# Altium PCB pcbxiao.PcbDoc (part 2 of 3)
Units mil, origin at the board's own origin, x right, y up, seen from the top; angles counter-clockwise.
Board outline 4666.32 x 1182.42 mil, 4 copper layers (Top Layer, Mid-Layer 1, Mid-Layer 2, Bottom Layer); 288 components, 144 nets, 734 pads, 278 vias.
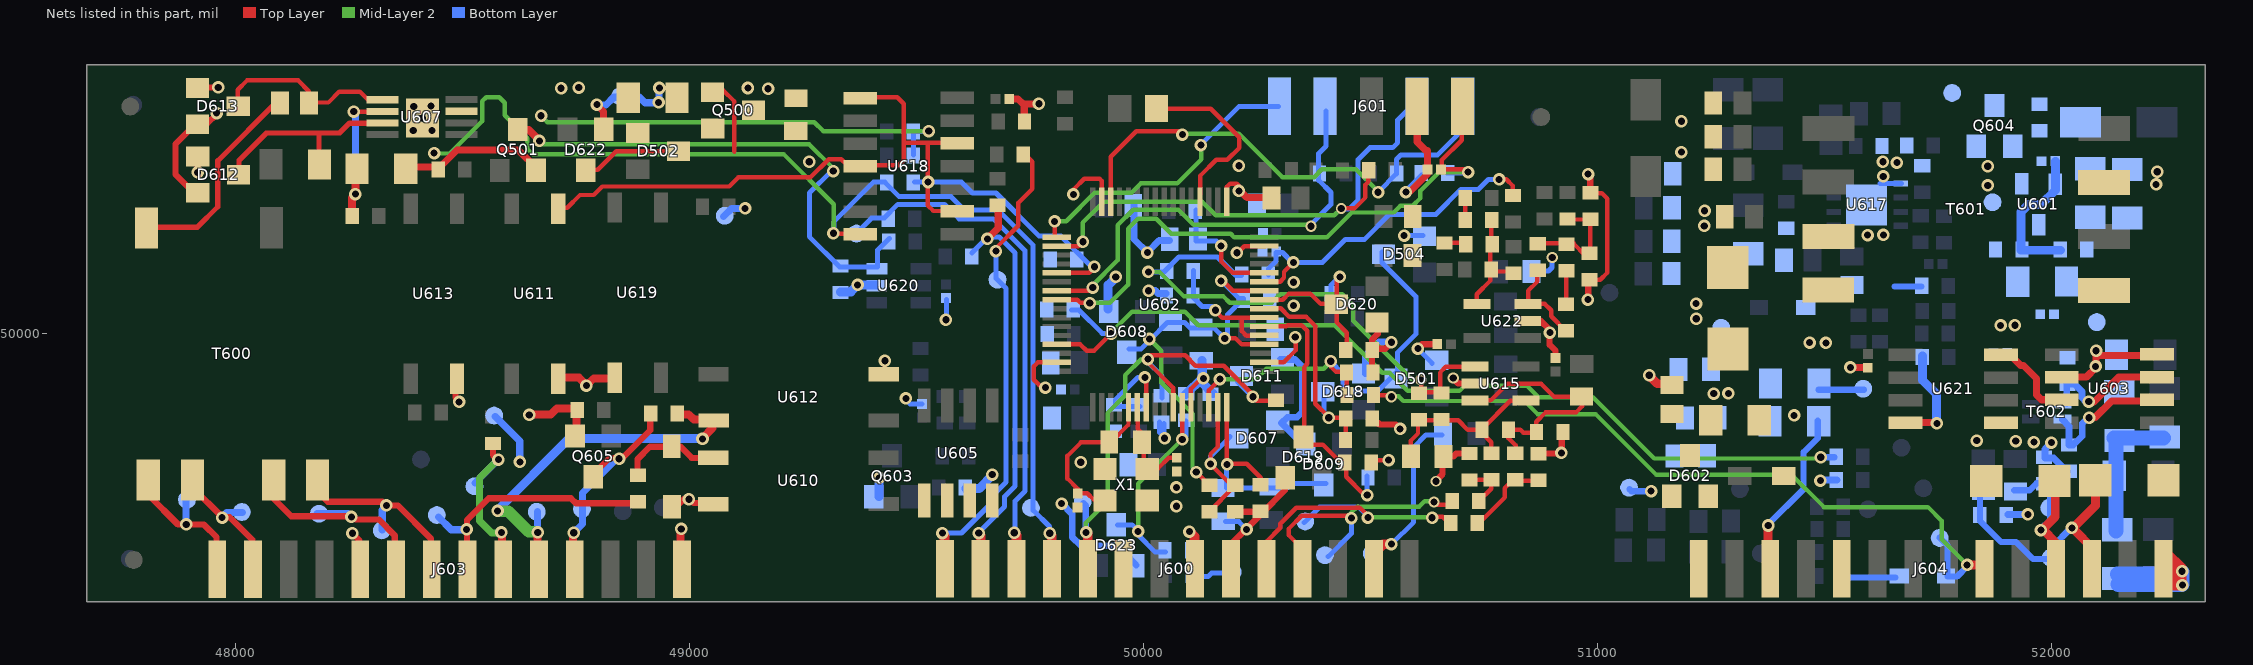
[diagram p3: the nets of this part, all layers, seen from the top]

## Via types
v1: diameter 27.56, hole 15.75, Top Layer to Bottom Layer, 267 vias
v2: diameter 25, hole 15.75, Top Layer to Bottom Layer, 7 vias
v3: diameter 24, hole 15.75, Top Layer to Bottom Layer, 4 vias

## Nets (pads, with @x,y where several pads share a name; then routed paths per layer and width w, separated by ;. In a path a pad name is that pad's centre, name@x,y a point inside that pad or via, vN(x,y) a via of type N, cw(c..) or ccw(c..) an arc to the next point about the centre after c; other vN are vias at no path point)
GND: C500.1 C501.2 C502.2 C503.1 C504.2 C505.2 C506.2 C507.1 C604.1 C605.2 C606.1 C608.1 C609.1 C610.1 C611.1 C613.1 C614.2 C615.2 C616.2 C618.1 C619.1 C620.1 C621.1 C625.1 C630.1 C632.1 C634.1 C635.2 C636.2 C637.1 C644.2 C645.1 C646.1 C647.1 C648.1 C650.2 C653.1 C664.2 C665.1 C666.2 C667.1 C671.2 C672.2 C675.2 C676.2 C681.2 C687.1 C688.1 C689.1 C699.2 C700.2 C816.1 C817.1 C818.1 C820.2 C821.1 C822.2 C823.1 C824.1 C826.1 C827.1 D501.1 D502.1 D504.1 D607.1 D608.1 D609.1 D611.1 D612.1 D613.1 D618.1 D619.1 D620.1 D623.1 J600.2 J600.4 J600.6 J600.9 J601.4 J604.5 Q501.2 Q603.2 R504.2 R600.1 R605.1 R612.1 R630.2 R631.1 R635.1 R645.1 R646.2 R654.1 R669.1 R689.2 R696.2 R706.1 R804.1 R811.1 R821.2 R822.1 R835.1 R837.2 T601.3 T601.5 TP12.1 TP16.1 TP24.1 U602.12 U602.18 U602.31 U602.33 U602.47 U602.63 U605.1 U605.2 U605.3 U605.4 U607.1@48411.23,50474.3 U607.3 U612.2 U615.2 U617.1@51667.92,50330 U617.6 U618.7 U620.2 U621.4 U622.2 X1.2 X1.4 | length 9395.9
  Top Layer w9.84: v1@49316.35,50219.17 U618.7@49388.43,50219.17 ; U612.2@49430.3,49910 v1@49430.3,49939.58 ; v1@49785.62,49881.46 49774.68,49881.46 49769.57,49886.56 49758.32,49897.81 49758.32,49926.88 49767.49,49936.04 U602.63@49809.89,49936.04 ; v1@49846.97,50306.46 49846.97,50317.92 49869.47,50340.42 49903.22,50340.42 49908.01,50335.62 U602.47@49908.01,50307.71 ; U602.12@50104.47,49834.79 50104.47,49877.71 50128.85,49902.08 v1@50133.64,49902.08 ; U602.33@50183.43,50287.71 50183.43,50322.29 50190.72,50329.58 50205.1,50329.58 50209.47,50325.21 v1@50209.47,50310.62 ; v1@50205.1,50174.79 50222.18,50191.88 U602.31@50267.6,50191.88 ; U602.18@50261.55,49936.04 50308.85,49936.04 50334.89,49962.08 v1@50334.89,49992.92 ; C648.1@50499.26,49720.21 v1@50539.26,49720.21 ; R835.1@50981.76,50117.92 51006.14,50117.92 51021.97,50133.75 51021.97,50296.67 51009.68,50308.96 C650.2@50988.01,50308.96
  Top Layer w13.78: D613.1@47905.3,50541.25 v1@47961.14,50541.25 ; v1@47916.55,50355 D612.1@47916.55,50398.75 ; J600.9@50192.39,49478.33 50192.39,49535.21 50225.94,49568.76 50261.05,49603.87 50311.35,49654.17 D619.1@50311.35,49685 ; C503.1@50204.68,49606.88 C645.1@50258.64,49606.88 ; C604.1@50502.18,49965.62 C604.1@50503.43,49965.62 ; C500.1@50503.43,49914.79 C604.1@50503.43,49965.62 ; C647.1@50507.8,49811.04 50519.89,49798.96 50555.72,49798.96 v1@50565.93,49788.75 ; D620.1@50515.72,50026.88 50515.72,49998.54 50503.43,49986.25 C604.1@50503.43,49965.62 ; v1@50546.55,49979.58 50532.6,49965.62 C604.1@50503.43,49965.62 ; v1@50603.43,49966.25 50613.22,49976.04 C620.1@50645.93,49976.04 ; v3@50644.05,49675.21 50658.64,49689.79 50658.64,49729.17 50683.01,49729.17 50689.05,49735.21 C672.2@50716.97,49735.21 ; v2@50681.76,49900.83 50693.22,49889.38 U615.2@50732.6,49889.38 ; U622.2@50841.14,50027.5 50874.47,50027.5 50894.47,50007.5 50894.47,49974.79 50907.8,49961.46 C818.1@50907.8,49945 ; C671.2@50868.43,49735.21 50921.14,49735.21 R654.1@50921.14,49777.08 ; v1@50978.85,50350.62 50984.26,50345.21 C650.2@50984.26,50311.88 ; v1@50979.47,50075.42 R835.1@50979.47,50116.67
  Top Layer w15.75: C667.1@48395.3,50366.46 48450.1,50366.46 48487.6,50403.96 48622.8,50403.96 48664.87,50361.9 Q501.2@48666.97,50359.79 ; v1@49655.93,50207.71 49680.1,50231.88 R821.2@49680.1,50279.79 ; C621.1@49705.1,50516.25 49723.85,50516.25 49735.3,50504.79 v1@49768.64,50504.79 ; R822.1@49737.18,50462.29 49737.18,50503.54 ; v1@50213.64,50313.12 50227.6,50299.17 C507.1@50278.01,50299.17 ; v1@50580.51,50312.29 v1@50583.43,50312.29 ; v1@50587.07,50312.29 50625.4,50350.62 50625.4,50402.29 ; J601.4@50603.01,50502.92 50603.01,50421.04 50621.76,50402.29 ; v1@51557.8,49924.38 C615.2@51596.14,49924.38 ; U621.4@51676.14,49803.12 v1@51746.35,49803.12
  Top Layer w19.68: v1@51114.05,49906.88 51132.18,49888.75 C504.2@51168.01,49888.75
  Top Layer w21.65: v1@49636.55,49558.96 49641.35,49554.17 J600.2@49641.35,49492.92 ; v1@49794.68,49558.33 49797.8,49555.21 J600.4@49797.8,49493.96
  Mid-Layer 2 w9.84: v1@48439.4,50396 48471.83,50396 48542.92,50467.08 48542.92,50511.04 48551.88,50520 48581.04,50520 48592.92,50508.12 48592.92,50480 48642.92,50430 48642.92,50406.04 48655,50393.96 49207.92,50393.96 49317.92,50283.96 v1@49317.92,50220.83 ; v1@48672.92,50478.96 48686.88,50465 49275,50465 49295,50445 v1@49526.9,50445
  Bottom Layer w11.02: v1@49317.92,50220 49317.92,50245.83 49405,50332.92 49430,50332.92 49461.88,50301.04 49575.83,50301.04 49604.79,50272.08 49679.17,50272.08 49757.08,50194.17 49757.08,49610 49792.92,49574.17 v1@49792.92,49556.04 ; v1@49477.92,49857.92 49477.92,49852.08 49486.04,49843.96 C613.1@49512.08,49843.96 ; R600.1@49492.92,50392.92 49492.92,50445 v1@49527.08,50445 ; v1@49566.04,50026 C636.2@49566.04,50073.92 ; R635.1@49622.08,50177.08 49657.08,50212.08 49682.08,50212.08 49717.08,50177.08 49717.08,49663.12 49693.96,49640 49693.96,49617.92 49636.41,49560.37 v1@49636.04,49560 ; C616.2@50035,49805 50035,49781.88 v1@50045,49771.88 ; v1@50045,49767.92 v1@50045,49771.88 ; C616.2@50045,49801.04 v1@50045,49771.88 ; v1@50047.92,49768.96 v1@50045,49771.88 ; R811.1@50181.04,49585 50210,49585 v1@50227.92,49567.08 ; v1@50572.92,50215 D504.1@50616.04,50215 ; v1@50603.96,49966.04 D501.1@50636.04,49933.96 ; R689.2@50862.92,50137.08 50892.08,50137.08 50900,50145 v2@50900,50167.08 ; 51622.08,50330 U617.1@51667.92,50330 U617.1@51670,50330
  Bottom Layer w13.78: 51655,50102.92 R605.1@51713.96,50102.92
  Bottom Layer w14.96: v1@49820,49625 49842.92,49602.08 49842.92,49551.04 49861.88,49532.08 49941.04,49532.08 D623.1@49983.96,49489.17 ; C666.2@49979.17,50282.92 49979.17,50207.08 50008.33,50177.92 50008.39,50177.98 50010.42,50180 50034.58,50204.17 C689.1@50057.08,50204.17 ; v1@50010,50093.96 50026.04,50093.96 50032.08,50087.92 C644.2@50050,50087.92 ; D611.1@50301.04,49942.08 50333.96,49942.08 50347.08,49928.96 50350,49926.04 50350,49827.08 50337.92,49815 50316.88,49815 50303.96,49802.08 D609.1@50350,49756.04 ; D618.1@50488.96,49911.04 50488.96,49951.04 50518.96,49981.04 v1@50547.08,49981.04 ; v1@50577.08,50311.04 50577.66,50311.62 R696.2@50612.92,50346.88 ; v1@51490.83,49677.08 C606.1@51527.92,49677.08
  Bottom Layer w15.75: TP12.1@49075,50257.08 49092.92,50275 v1@49122.08,50275
  Bottom Layer w19.68: C502.2@49332.92,50091.04 49355.21,50091.04 v1@49372.08,50107.92 ; v1@49372.08,50105.92 U620.2@49412.08,50105.92 ; Q603.2@49417.08,49640 v1@49417.08,49682.92 ; R669.1@49608.96,49657.92 49637.92,49657.92 v1@49667.92,49687.92 ; D608.1@49922.08,50052.92 49922.08,50106.04 49939.54,50123.5 v1@49940,50123.96 ; C823.1@50092.92,49865 50094.49,49866.57 50128.96,49901.04 R706.1@50128.96,49940 ; R706.1@50130,49931.04 50130,49890 C821.1@50152.92,49867.08 ; R804.1@51715.83,49950 51715.83,49897.08 51747.08,49865.83 v1@51747.08,49802.08
  other v1: 49793.56,49559.47 49636.9,49559.89 50226.9,49567.8 50072.39,49618.96 49819.4,49624.89 50072.31,49660.3 51491.06,49675.3 49417.73,49681.55 49666.9,49688.64 49861.9,49715.72 50539.81,49720.72 50920.53,49736.55 50046.48,49768.64 50565.23,49789.47 51747.73,49801.55 51433.15,49819.05 49476.48,49856.55 49783.98,49880.3 50131.9,49900.72 51113.98,49907.39 51557.31,49924.89 49430.23,49939.47 50604.28,49966.14 50546.06,49980.3 50334.4,49991.76 50895.12,50001.55 49564.81,50029.89 51217.73,50031.97 50330.65,50060.93 51217.31,50065.3 50978.87,50074.05 50011.06,50093.64 49370.23,50106.55 50330.65,50112.39 49938.98,50124.05 50205.65,50177.39 50008.56,50177.8 49656.06,50207.8 50573.98,50215.3 51595.23,50216.14 51629.81,50216.55 49316.9,50220.3 49122.27,50274.89 49845.65,50305.72 50578.15,50311.14 50210.23,50313.64 51629.4,50345.72 50979.28,50350.72 47916.44,50354.47 50210.23,50369.05 51659.81,50376.14 49263.52,50377.8 51628.98,50377.8 48437.27,50396.97 51184.81,50399.05 49526.9,50445.3 48391.23,50446.39 48432.27,50446.39 51184.81,50466.97 48411.23,50474.3 48673.11,50479.05 48392.27,50499.72 48430.19,50500.35 49769.4,50505.72 48716.86,50539.89 48756.02,50541.14 47961.86,50541.76
  other v2: 50682.2,49901.55 50900.53,50166.97
  other v3: 50644.28,49674.05
GND1: D615.2 J603.5 J603.14 Q605.2 R813.1 TP0.1 U610.2 U611.2 U613.2 U619.3 | length 690.7
  Top Layer w13.78: v1@48258.18,49558.33 48272.76,49543.75 J603.5@48272.76,49507.5 ; U613.2@48484.43,49895.42 48484.43,49858.54 v1@48493.6,49849.38 ; D615.2@48961.51,49608.75 48986.93,49634.17 49001.51,49634.17 49009.43,49626.25 U610.2@49054.01,49626.25
  Top Layer w17.72: v1@48647.56,49820.83 48694.22,49820.83 48707.56,49834.17 R813.1@48748.81,49834.17 ; U611.2@48706.93,49902.08 48756.1,49902.08 48773.18,49885 48789.01,49900.83 U619.3@48829.43,49900.83 ; Q605.2@48750.68,49773.33 R813.1@48750.68,49830.42 ; J603.14@48980.26,49514.17 v1@48980.26,49568.75
  Bottom Layer w15.75: TP0.1@48572.08,49816.67 48625.83,49762.92 v1@48625.83,49715.83
  other v1: 48257.27,49559.47 48981.86,49569.05 48998.52,49634.47 48626.44,49716.55 48646.86,49820.3 48492.27,49848.64 48772.69,49884.89
GND2: C631.2 C656.2 C657.1 C673.1 C674.1 C694.2 C695.2 C802.1 C803.2 C819.1 D605.1 D621.2 R675.1 R806.2 T601.7 TP35.1 U601.3 U603.2 U603.8 U621.5 | length 379.3
  Top Layer w15.75: U603.2@52025.93,49903.33 52076.76,49903.33 52098.01,49924.58 v1@52098.01,49960.21 ; v1@52102.39,49951.25 U603.8@52221.14,49951.25
  Bottom Layer w14.96: C694.2@51903.96,49601.04 v1@51947.92,49601.04 ; v1@51999.17,49757.92 51985.83,49744.58 51985.83,49725 52005,49725 C657.1@52035,49695
  other v1: 51948.22,49600.83 51999.81,49759.05 51961.48,49760.3 51921.48,49762.39 51835.65,49763.64 52097.31,49926.97 52098.56,49961.55 52230.65,50327.8 52233.15,50355.72
NetC500_2: C500.2 D501.3 D504.3 R500.2 U602.14 | length 962.8
  Top Layer w9.84: U602.14@50144.05,49834.17 50144.05,49874.17 v1@50168.22,49898.33 ; v1@50413.22,49938.33 50413.22,49925.62 50424.05,49914.79 50448.22,49914.79 R500.2@50448.22,49857.71
  Mid-Layer 2 w9.84: v1@50167.92,49899.17 50247.92,49899.17 50270.83,49922.08 50397.08,49922.08 v1@50412.08,49937.08
  Bottom Layer w11.02: v1@50411.04,49938.96 50440,49910 50440,49883.96 50451.04,49872.92 50516.04,49872.92 50560,49916.88 50560,49958.02 50600,49998.02 50600,50081.04 50525,50156.04 D504.3@50525,50178.96
  other v1: 50168.15,49899.05 50412.6,49938.33
NetC501_1: C501.1 C667.2 D612.2 D613.2 D622.1 Q500.2 R836.2 TP32.1 U607.6 | length 857
  Top Layer w9.84: v1@48261.35,50488.33 U607.6@48324.47,50488.33
  Top Layer w13.78: D612.2@47915.3,50302.08 47912.3,50305.08 47867.39,50350 47867.39,50416.67 47911.97,50461.25 47936.55,50461.25 v1@47958.22,50482.92
  Top Layer w15.75: v1@48796.14,50502.92 48810.72,50488.33 D622.1@48810.72,50447.71
  Top Layer w17.72: R836.2@48256.55,50256.67 48256.55,50298.54 48263.85,50305.83 C667.2@48263.85,50367.5
  Bottom Layer w15.75: v1@48260,50488.12 48264.17,50483.96 v1@48264.17,50305.83 ; v1@48796.04,50502.92 48816.04,50502.92 48833.12,50520 48890,50520 48902.08,50507.92 48932.92,50507.92 v1@48932.92,50541.04
  other v1: 48263.94,50306.55 47958.11,50484.89 48260.19,50488.22 48796.02,50503.64 48931.86,50508.43 48933.52,50540.3
NetC502_1: C502.1 Q501.3 R505.2 U620.3 | length 1157.8
  Top Layer w15.75: Q501.3@48621.55,50448.33 48645.93,50448.33 48669.99,50424.27 v1@48670.72,50423.54
  Mid-Layer 2 w9.84: v1@48668.96,50423.12 48676.04,50416.04 49263.96,50416.04 49317.08,50362.92 v1@49317.08,50357.08
  Bottom Layer w11.02: v1@49316.04,50357.08 49312.08,50357.08 49263.96,50308.96 49263.96,50212.92 49330.83,50146.04 49413.96,50146.04 49413.96,50182.92 49436,50204.96 R505.2@49440,50208.96
  other v1: 49316.48,50357.39 48669.36,50423.64
NetC503_2: C503.2 D607.3 R506.1 U602.15 | length 357.2
  Top Layer w9.84: R506.1@50145.72,49608.12 50198.43,49660.83 50198.22,49661.04 50147.6,49711.67 50147.6,49733.96 50164.05,49750.42 U602.15@50164.05,49837.71
  Bottom Layer w11.02: v1@50147.92,49712.08 50147.92,49728.96 D607.3@50191.04,49772.08
  other v1: 50147.73,49712.39
NetC504_1: C504.1 C619.2 C826.2 C827.2 D602.3 LB600.1 R659.2
  other v1: 51256.06,49866.97 51288.56,49867.39 51235.23,50236.55 51236.06,50269.89
NetC603_1: C603.1 C670.1 R644.1 R701.1 U622.4 | length 246.6
  Top Layer w9.84: U622.4@50733.85,50066.25 50733.85,50085.83 50764.26,50116.25 R701.1@50764.26,50197.29 ; C603.1@50764.89,50136.04 R644.1@50814.47,50136.04 ; R701.1@50765.93,50198.54 C670.1@50765.93,50251.88
NetC604_2: C604.2 D620.3 R695.2 U602.25 | length 413.1
  Top Layer w9.84: U602.25@50258.01,50074.17 50306.97,50074.17 50320.3,50087.5 50367.6,50087.5 50390.51,50064.58 D620.3@50425.3,50064.58 ; v1@50431.97,50125.83 50431.46,50125.32 50425.3,50119.17 D620.3@50425.3,50064.58 ; D620.3@50433.85,50064.58 D620.3@50425.3,50064.58 ; C604.2@50447.8,49959.58 50447.8,50001.46 50425.3,50023.96 D620.3@50425.3,50064.58
  Bottom Layer w11.02: R695.2@50413.12,50088.96 50413.12,50106.04 v1@50432.08,50125
  other v1: 50432.73,50124.05
NetC605_1: C605.1 R682.1 U602.61 | length 2015.8
  Top Layer w9.84: U602.61@49806.76,49975.42 49860.82,49975.42 49874.78,49961.46 49891.14,49961.46 v1@49930.51,50000.83
  Mid-Layer 2 w9.84: v1@49927.08,50000 49975,50047.92 50090.83,50047.92 50120.83,50017.92 50420.83,50017.92 50526.04,49912.71 50542.08,49912.71 50581.88,49872.92 50696.04,49872.92 50707.08,49883.96 50845,49883.96 50870,49858.96 50990,49858.96 51124.79,49724.17 51487.92,49724.17 v1@51492.08,49728.33
  Bottom Layer w11.02: C605.1@49841.04,50051.04 49857.92,50051.04 49908.96,50000 v1@49928.96,50000
  Bottom Layer w13.78: v1@51491.04,49727.08 R682.1@51522.08,49727.08
  other v1: 51491.9,49726.97 49928.56,49999.05
NetC608_2: C608.2 R603.2 U602.5 X1.1 | length 378.1
  Top Layer w9.84: X1.1@49913.64,49632.92 49891.14,49632.92 49876.14,49647.92 49855.3,49647.92 49855.3,49657.08 49832.39,49680 49832.39,49729.79 49862.18,49759.58 R603.2@49927.6,49759.58 ; R603.2@49924.47,49756.46 R603.2@49927.6,49759.58 ; R603.2@49932.39,49759.58 R603.2@49927.6,49759.58 ; U602.5@49966.97,49848.75 49966.97,49798.96 R603.2@49927.6,49759.58
NetC609_2: C609.2 C630.2 D600.2 D604.2 J604.3 Q500.3 R501.2 TP22.1 | length 434.3
  Top Layer w19.68: J604.3@51376.14,49516.25 v1@51376.14,49575.83
  Bottom Layer w13.78: v1@51375,49577.92 51453.96,49656.88 51453.96,49737.92 51485,49768.96 C630.2@51485,49807.08 ; C609.2@51487.08,49875.83 TP22.1@51587.08,49875.83
  other v1: 51376.06,49576.55 51467.31,49979.47 51503.15,49978.64 49173.11,50538.64 49128.52,50540.3
NetC612_1: C612.1 C684.2 R612.2 R655.1 R679.2 U615.4 | length 419.7
  Top Layer w9.84: R612.2@50589.05,49721.46 50589.05,49763.75 50604.68,49779.38 50604.68,49808.12 50693.22,49808.12 50713.85,49787.5 50738.64,49787.5 50742.17,49783.97 50765.93,49760.21 R679.2@50765.93,49734.17 ; C684.2@50747.8,49791.04 50807.8,49851.04 U615.4@50842.39,49851.04
NetC612_2: C612.2 R655.2 R677.2 R705.2 U615.1 | length 1159.9
  Top Layer w9.84: v2@50611.35,49897.71 50611.35,49870 50653.22,49870 50653.22,49913.54 50665.93,49926.25 U615.1@50724.26,49926.25
  Mid-Layer 2 w9.84: v1@50010,50135 50035.21,50135 50089.17,50081.04 50176.04,50081.04 50190,50067.08 50282.08,50067.08 50301.04,50086.04 50438.12,50086.04 50439.17,50085 50462.08,50062.08 50462.08,50027.92 50592.08,49897.92 v2@50610,49897.92
  Bottom Layer w11.02: v1@50010,50135 50045,50135 50077.92,50167.92 50162.92,50167.92 50203.75,50127.08 R677.2@50216.04,50127.08
  other v1: 50010.65,50135.3
  other v2: 50610.95,49897.39
NetC614_1: C614.1 J601.5 R696.1 U602.56 | length 1404.9
  Top Layer w9.84: U602.56@49805.72,50074.17 49854.05,50074.17 49861.35,50066.88 v1@49881.35,50066.88 ; C614.1@50656.97,50359.79 50656.97,50381.67 50700.72,50425.42 J601.5@50700.72,50495.42 ; C614.1@50659.26,50361.04 50708.43,50361.04 v1@50714.47,50355
  Mid-Layer 2 w9.84: v1@49881.04,50067.08 49926.04,50067.08 49966.04,50107.08 49966.04,50230.21 49987.92,50252.08 50027.92,50252.08 50061.04,50218.96 50192.08,50218.96 50200,50211.04 50403.96,50211.04 50458.96,50266.04 50551.04,50266.04 50566.04,50281.04 50593.12,50281.04 50610,50297.92 50610,50313.96 50651.04,50355 v1@50715,50355
  Bottom Layer w14.96: R696.1@50668.96,50355 v1@50715,50355
  other v1: 49881.48,50066.55 50715.12,50354.89
NetC616_1: C616.1 D611.3 J600.5 R703.2 TP15.1 U602.10 | length 1195.4
  Top Layer w9.84: U602.10@50065.72,49832.92 50065.72,49879.58 50009.89,49935.42 50009.89,49951.25 50091.76,49951.25 50114.26,49928.75 50176.76,49928.75 50240.93,49864.58 50240.93,49858.33 50248.22,49851.04 R703.2@50286.97,49851.04
  Top Layer w21.65: v1@49874.05,49560.62 49877.18,49557.5 J600.5@49877.18,49491.67
  Mid-Layer 2 w9.84: v1@49872.92,49560.83 49872.92,49582.08 49920.83,49630 49920.83,49824.17 49960,49863.33 49960,49907.92 49995,49942.92 v1@50012.08,49942.92
  Bottom Layer w11.02: v1@50008.96,49943.96 50008.96,49937.08 50041.04,49905 ; C616.1@50041.04,49857 50041.04,49904.92 ; D611.3@50207.08,49893.75 v1@50240,49860.83
  Bottom Layer w14.96: TP15.1@49867.92,49625 49872.92,49620 v1@49872.92,49562.08
  other v1: 49873.56,49561.14 50241.06,49860.3 50009.81,49943.22
NetC618_2: C618.2 R677.1 R711.2 U602.27 | length 785.7
  Top Layer w9.84: U602.27@50260.93,50113.65 50301.03,50113.65 50309.47,50122.08 50309.47,50135.52 v1@50330.62,50156.67 ; v1@50783.64,50339.17 50799.26,50339.17 50813.85,50324.58 R711.2@50813.85,50303.33
  Bottom Layer w11.02: R677.1@50275,50127.92 50275,50142.08 50292.08,50159.17 50292.08,50177.92 50306.04,50177.92 50327.92,50156.04 50393.96,50156.04 50445,50207.08 50487.08,50207.08 50542.08,50262.08 50644.17,50262.08 50699.17,50317.08 50737.92,50317.08 50760,50339.17 v1@50782.92,50339.17
  other v1: 50330.23,50156.14 50783.45,50339.05
NetC624_1: C624.1 D613.3 U607.5 | length 418.8
  Top Layer w9.84: D613.3@48004.47,50497.92 48004.47,50536.25 48025.1,50556.88 48137.8,50556.88 48161.35,50533.33 48161.35,50508.33 48204.47,50508.33 48228.64,50532.5 48273.43,50532.5 48292.18,50513.75 U607.5@48323.85,50513.75
NetC624_2: C624.2 T600.2 | length 466.1
  Top Layer w11.81: T600.2@47801.97,50233.75 47915.72,50233.75 47960.72,50278.75 47960.72,50379.79 C624.2@48093.43,50512.5
NetC626_1: C626.1 R805.2 R806.1 U601.2 | length 330.1
  Bottom Layer w19.68: C626.1@52008.96,50377.92 52008.96,50315 51977.92,50283.96 51949.79,50283.96 51932.92,50267.08 51932.92,50182.92 R806.1@52020,50182.92
NetC626_2: C626.2 Q604.1 R803.1 U601.1
NetC628_1: C628.1 R713.1 U622.3 | length 203.9
  Top Layer w9.84: R713.1@50867.8,50146.46 50867.8,50114.17 50847.8,50094.17 50847.8,50065.21 50883.43,50065.21 50898.01,50050.62 50898.01,50037.29 C628.1@50929.68,50005.62
NetC628_2: C628.2 R712.1 | length 85.6
  Top Layer w9.84: C628.2@50931.55,50054.17 R712.1@50931.55,50139.79
NetC631_1: C631.1 C802.2 C819.2 Q604.2 R805.1 TP34.1 U603.3 U621.8 | length 179.5
  Top Layer w15.75: U621.8@51908.95,49952.29 51932.49,49928.75 51938.64,49928.75 51967.18,49900.21 51967.18,49864.38 51978.01,49853.54 U603.3@52026.55,49853.54
  other v1: 51888.15,50017.39 51919.61,50017.8 51859.81,50325.72 51859.81,50367.8
NetC635_1: C635.1 R630.1 U602.53 U611.3 U618.1 U618.4 U618.9 U618.12 | length 1952.5
  Top Layer w9.84: U611.3@48709.47,50276.67 48730.72,50276.67 48758.64,50304.58 48788.85,50304.58 48807.6,50323.33 49087.18,50323.33 49107.18,50343.33 49266.14,50343.33 49306.35,50383.54 49334.47,50383.54 49347.39,50370.62 49460.72,50370.62 49471.55,50381.46 49471.55,50419.79 ; U618.1@49363.01,50519.79 49457.6,50519.79 49471.55,50505.83 49471.55,50419.79 ; 49524.89,50419.17 49524.89,50281.67 49537.18,50269.38 U618.9@49584.26,50269.38 ; U618.12@49595.93,50419.79 49471.55,50419.79 ; U602.53@49805.1,50133.12 49880.3,50133.12 v1@49895.3,50148.12
  Bottom Layer w11.02: C635.1@49495,50332.92 49598.96,50332.92 49622.92,50308.96 49675,50308.96 49770,50213.96 49817.92,50213.96 49884.79,50147.08 v1@49892.92,50147.08
  other v1: 49891.9,50146.55 49525.65,50333.22
NetC644_1: C644.1 R705.1 U602.21 U602.23 | length 315.7
  Top Layer w9.84: v1@50157.39,50049.79 50173.01,50034.17 U602.23@50266.35,50034.17 ; 50216.76,50033.54 50216.76,50004.38 50226.35,49994.79 U602.21@50265.72,49994.79
  Bottom Layer w11.02: R705.1@50110,50137.92 50110,50077.92 50128.96,50058.96 50152.08,50058.96 v1@50157.92,50053.12
  other v1: 50158.56,50050.72
NetC645_2: C645.2 D609.3 R621.2 R811.2 U602.16 | length 504.9
  Top Layer w9.84: v1@50183.43,49712.92 U602.16@50183.43,49837.71 ; v1@50185.1,49712.29 50227.6,49712.29 50258.01,49681.88 C645.2@50258.01,49663.75
  Bottom Layer w11.02: v1@50182.92,49712.08 50182.92,49658.96 50316.04,49658.96 50326.04,49668.96 D609.3@50402.08,49668.96
  other v1: 50183.98,49711.14
NetC646_2: C646.2 D608.3 R506.2 R610.2 R706.2 U602.20 U602.26 | length 993.9
  Top Layer w9.84: v1@50116.76,49693.54 50145.43,49664.88 R506.2@50146.35,49663.96 ; v1@50170.1,50114.79 50175.51,50114.79 50196.76,50093.54 U602.26@50266.35,50093.54 ; v1@50178.43,49989.38 50202.18,49989.38 50216.14,49975.42 U602.20@50266.35,49975.42
  Mid-Layer 2 w9.84: v1@50012.92,49987.92 50039.17,49961.67 50039.17,49892.08 50107.92,49823.33 50107.92,49704.17 50117.05,49695.04 v1@50117.08,49695
  Bottom Layer w11.02: D608.3@49967.92,49965 49993.96,49965 50014.75,49985.79 50052.92,50023.96 50090.21,50023.96 50102.08,50012.08 50155,50012.08 50175,49992.08 50185,49992.08 50185,50041.04 50220,50076.04 50211.04,50076.04 v1@50172.08,50115
  other v1: 50116.06,49694.05 50013.15,49987.39 50178.98,49988.64 50171.06,50115.3
NetC647_2: C647.2 D618.3 R691.2 U602.24 | length 506.7
  Top Layer w9.84: U602.24@50260.93,50054.79 50302.18,50054.79 50320.93,50036.04 50358.64,50036.04 50378.64,50016.04 50378.64,49845 50410.1,49813.54 50445.3,49813.54 R691.2@50445.3,49761.25
  Bottom Layer w11.02: D618.3@50397.08,49878.96 50397.08,49825.83 v1@50408.96,49813.96
  other v1: 50408.15,49814.05
NetC648_2: C648.2 D619.3 R690.2 U602.22 | length 594.6
  Top Layer w9.84: U602.22@50263.43,50015.42 50314.89,50015.42 50317.39,50017.92 50348.64,50017.92 50360.93,50005.62 50360.93,49932.92 50353.64,49925.62 D619.3@50353.64,49764.58 ; D619.3@50350.1,49754.79 50394.89,49754.79 50430.72,49718.96 C648.2@50445.93,49718.96 ; C648.2@50446.55,49713.54 50446.55,49683.75 50484.68,49645.62 v1@50496.14,49645.62
  Bottom Layer w11.02: v1@50492.08,49645 R690.2@50492.08,49686.04
  other v1: 50492.73,49643.64
NetC650_1: C650.1 R634.1 R712.2 R713.2 R835.2 | length 233.9
  Top Layer w9.84: R713.2@50864.89,50197.92 50947.39,50197.92 R835.2@50973.43,50171.88 ; R634.1@50941.76,50250.62 50983.64,50250.62 R835.2@50983.64,50177.92
NetC653_2: C653.2 R603.1 U602.6 X1.3 | length 215.2
  Top Layer w9.84: U602.6@49986.97,49837.71 49986.97,49789.79 R603.1@50005.72,49771.04 ; R603.1@50000.93,49763.75 50000.93,49703.12 50033.01,49703.12 50055.51,49725.62 C653.2@50071.76,49725.62
NetC656_1: C656.1 T602.1 U603.7 | length 293.2
  Top Layer w15.75: v1@52080.51,49848.75 52093.85,49848.75 52148.43,49903.33 U603.7@52236.35,49903.33
  Bottom Layer w14.96: T602.1@52033.96,49846.04 52033.96,49887.92 52051.04,49887.92 52067.08,49871.88 52067.08,49857.92 52075,49850 v1@52082.92,49850
  other v1: 52082.31,49849.47
NetC657_2: C657.2 T602.4 U603.6 | length 312.1
  Top Layer w15.75: v1@52079.26,49814.79 52096.76,49814.79 52132.39,49850.42 U603.6@52230.3,49850.42
  Bottom Layer w14.96: T602.4@52023.96,49810 52038.96,49795 C657.2@52038.96,49753.96 52047.92,49753.96 52067.92,49773.96 52067.92,49801.04 v1@52081.88,49815
  other v1: 52083.15,49813.85
NetC660_1: C660.1 R701.2 | length 54
  Top Layer w9.84: C660.1@50663.01,50199.17 R701.2@50716.97,50199.17
NetC670_2: C670.2 R601.2 | length 51.5
  Top Layer w9.84: C670.2@50709.05,50248.33 R601.2@50709.05,50299.79
NetC671_1: C671.1 R619.1 R678.1 | length 174.1
  Top Layer w9.84: R619.1@50741.76,49584.38 50795.72,49638.33 50795.72,49658.96 50811.97,49675.21 C671.1@50866.14,49675.21
NetC672_1: C672.1 R620.1 R679.1 | length 112.7
  Top Layer w9.84: C672.1@50715.1,49677.71 50765.93,49677.71 50765.93,49657.71 R620.1@50736.35,49628.12
NetC673_2: C673.2 C674.2 D617.1 Q604.3 R803.2 TP33.1
NetC684_1: C684.1 R613.2 R654.2 R678.2 U615.3 | length 550.3
  Top Layer w9.84: U615.3@50729.68,49852.29 50765.3,49852.29 50801.76,49888.75 50875.72,49888.75 50904.26,49860.21 50966.76,49860.21 50966.76,49839.58 50952.8,49825.62 50885.51,49825.62 50864.89,49805 50864.89,49780.83 50836.97,49780.83 50830.3,49787.5 50803.64,49787.5 50803.64,49769.17 50819.89,49752.92 R678.2@50819.89,49732.92
NetC689_2: C689.2 R604.1 U602.28 | length 269.4
  Top Layer w9.84: v1@50171.76,50193.12 50171.76,50157.4 50196.14,50133.02 U602.28@50267.07,50133.02
  Bottom Layer w11.02: R604.1@50116.04,50272.08 50116.04,50202.92 50161.04,50202.92 v1@50171.04,50192.92
  other v1: 50171.06,50192.39
NetC694_1: C694.1 D605.2 J604.12 LB602.1 TP30.1 | length 544.4
  Top Layer w19.68: J604.12@52094.89,49522.5 52046.97,49570.42 52097.39,49620.83 D605.2@52097.39,49683.75
  Bottom Layer w13.78: LB602.1@51842.92,49649.17 51842.92,49586.25 51889.17,49540 51922.08,49540 51959.17,49502.92 52000.83,49502.92 52000.83,49528.75 v1@52044.17,49572.08
  other v1: 52045.23,49571.14
NetC695_1: C695.1 D621.1 J604.11 LB603.1 TP29.1 | length 403.2
  Top Layer w19.68: D621.1@52008.43,49676.67 52008.43,49595.83 51980.51,49567.92 52010.1,49538.33 J604.11@52010.1,49493.96
  Bottom Layer w13.78: LB603.1@51917.92,49653.96 51951.88,49653.96 51967.92,49670 51997.08,49670 51997.08,49589.17 v1@51975.83,49567.92
  other v1: 51976.9,49566.55
NetC803_1: C803.1 C804.2 R807.1 R808.1 | length 311.2
  Bottom Layer w33.47: C803.1@52137.92,49769.17 R808.1@52247.08,49769.17 ; C804.2@52142.08,49565 52142.08,49685.97 C803.1@52142.08,49767.08
NetC804_1: C804.1 J604.14 R802.1 | length 486.1
  Top Layer w19.68: J604.14@52244.26,49443.12 52287.8,49443.12 52287.8,49475.72 52287.8,49483.75 J604.14@52254.47,49517.08 ; 52270.93,49447.92 52270.93,49494.58
  Bottom Layer w33.47: C804.1@52145.83,49469.17 v1@52287.08,49469.17 ; C804.1@52147.08,49447.08 52287.08,49447.08 v1@52287.08,49469.17 ; v1@52287.08,49473.96 v1@52287.08,49469.17
  other v1: 52288.56,49445.3 52287.73,49475.72
NetC820_1: C820.1 R838.1 U602.7 | length 226.7
  Top Layer w9.84: v1@50001.55,49905.62 50006.35,49900.83 U602.7@50006.35,49834.79
  Bottom Layer w11.02: R838.1@49992.08,49838.96 49937.92,49838.96 49937.92,49852.92 49987.92,49902.92 v1@50002.92,49902.92
  other v1: 50003.15,49902.8
NetC823_2: C823.2 D623.3 R839.2 U602.11 | length 495.5
  Top Layer w9.84: v1@50085.1,49766.88 U602.11@50085.1,49838.33
  Mid-Layer 2 w9.84: v1@49987.92,49562.92 49987.92,49668.75 v1@50085,49765.83
  Bottom Layer w11.02: D623.3@49942.92,49577.92 49975,49577.92 49987.92,49565 49987.92,49556.04 50026.04,49517.92 R839.2@50047.92,49517.92 ; v1@50085,49765 50093.96,49773.96 C823.2@50093.96,49807.08
  other v1: 49988.15,49563.64 50085.23,49766.14
NetD500_1: D500.1 J604.9 R500.1 TP28.1 | length 1672.9
  Top Layer w9.84: R500.1@50504.68,49863.33 v2@50545.3,49863.33
  Top Layer w19.68: v1@51814.47,49489.17 J604.9@51849.89,49489.17
  Mid-Layer 2 w9.84: v2@50547.08,49860.83 50562.08,49860.83 50572.08,49850.83 50839.17,49850.83 50867.92,49822.08 50995.83,49822.08 51130,49687.92 51428.12,49687.92 51498.96,49617.08 51727.92,49617.08 51757.92,49587.08 51757.92,49546.25 v1@51814.17,49490
  Bottom Layer w13.78: TP28.1@51753.96,49550 51754.27,49549.69 51771.04,49532.92 51771.04,49463.96 51792.08,49463.96 51816.04,49487.92 v1@51816.04,49492.08
  other v1: 51814.4,49489.89
  other v2: 50546.06,49860.3
NetD500_2: D500.2 R502.2 | length 112.9
  Bottom Layer w13.78: R502.2@51542.92,49462.08 D500.2@51655.83,49462.08
NetD502_3: D502.3 D622.3 Q500.1 R501.1 | length 402.4
  Top Layer w9.84: D622.3@48769.89,50360 48797.8,50360 48838.85,50401.04 D502.3@48979.05,50401.04 ; Q500.1@49043.01,50535 49074.47,50535 49098.01,50511.46 49098.01,50400
NetD601_1: D601.1 R659.1
NetD602_1: D602.1 D602.2 J604.1 TP20.1 | length 48.8
  Bottom Layer w13.78: TP20.1@51070.83,49656.25 51075,49652.08 v1@51117.92,49652.08
  other v1: 51118.15,49652.39
NetD604_1: D604.1 T601.4
NetD612_3: D612.3 R651.1 U607.7 | length 468.1
  Top Layer w11.81: D612.3@48007.39,50345.83 48007.39,50381.04 48067.6,50441.25 48229.26,50441.25 48250.93,50462.92 U607.7@48317.18,50462.92 ; R651.1@48183.85,50351.25 48183.85,50440.42
NetD614_1: D614.1 U602.36 | length 378.4
  Top Layer w9.84: D614.1@50034.26,50494.38 50148.22,50494.38 50210.72,50431.88 50210.72,50408.33 50184.68,50382.29 50160.3,50382.29 50125.72,50347.71 50124.57,50346.56 U602.36@50124.57,50305.83
NetD615_1: D615.1 R720.1 U610.1 | length 227.4
  Top Layer w13.78: R720.1@48885.26,49685.42 48885.26,49722.5 48912.76,49750 48980.26,49750 49004.85,49725.42 U610.1@49054.01,49725.42
NetJ600_1: J600.1 R666.1 TP11.1 | length 1017.6
  Top Layer w9.84: v1@49674.05,50180.42 49674.05,50186.88 49723.85,50236.67 49723.85,50287.08 49754.68,50317.92 49754.68,50378.12 R666.1@49736.55,50396.25
  Top Layer w21.65: v1@49556.97,49558.33 49561.97,49553.33 J600.1@49561.97,49513.33
  Bottom Layer w11.02: v1@49555,49560 49598.96,49560 49666.04,49627.08 49666.04,49641.04 49697.08,49672.08 49697.08,50098.96 49678.23,50117.81 49675,50121.04 v1@49675,50180
  other v1: 49556.9,49559.89 49674.81,50181.14
NetJ600_3: J600.3 R665.2 TP13.1 | length 1139.5
  Top Layer w21.65: v1@49715.3,49559.58 49720.1,49554.79 J600.3@49720.1,49495.21
  Bottom Layer w11.02: TP13.1@49366.04,50218.96 49401.04,50253.96 49428.96,50253.96 49458.96,50283.96 49562.08,50283.96 49593.96,50252.08 49668.96,50252.08 49738.96,50182.08 49738.96,49652.08 49717.08,49630.21 v1@49717.08,49560
  other v1: 49715.23,49560.72
NetJ600_8: J600.8 R839.1 R840.1 TP36.1 | length 273.3
  Top Layer w21.65: v1@50102.8,49561.88 50112.39,49552.29 J600.8@50112.39,49475.42
  Bottom Layer w11.02: v1@50100,49563.96 50108.96,49555 50108.96,49477.92 50122.92,49463.96 50142.08,49463.96 50150.21,49472.08 TP36.1@50192.92,49472.08
  other v1: 50101.06,49563.22
NetJ600_10: J600.10 R619.2 TP17.1 | length 665.5
  Top Layer w9.84: J600.10@50271.97,49505 50271.97,49541.88 50301.55,49571.46 50301.55,49580.62 50336.76,49615.83 50476.76,49615.83 50494.47,49598.12 v1@50494.47,49592.29 ; v1@50635.72,49590.42 50637.29,49591.99 50641.14,49595.83 50658.85,49595.83 R619.2@50676.97,49577.71
  Mid-Layer 2 w9.84: v1@50493.96,49595 v1@50636.04,49595
  Bottom Layer w11.02: TP17.1@50353.96,49582.92 50387.08,49616.04 50387.92,49616.88 50473.96,49616.88 v1@50495,49595.83
  other v1: 50494.4,49594.05 50635.65,49593.64
NetJ600_11: J600.11 R620.2 TP18.1 | length 560.8
  Top Layer w9.84: J600.11@50349.05,49525.83 50320.3,49554.58 50320.3,49569.79 50348.85,49598.33 50451.97,49598.33 50457.82,49592.48 v1@50458.01,49592.29 ; v3@50639.89,49629.79 50640.58,49629.1 50647.8,49621.88 R620.2@50678.01,49621.88
  Mid-Layer 2 w9.84: v1@50457.92,49592.08 50457.92,49605 50470.83,49617.92 50607.08,49617.92 50619.17,49630 v3@50640,49630
  Bottom Layer w11.02: TP18.1@50406.88,49507.92 50457.92,49558.96 v1@50457.92,49592.92
  other v1: 50458.15,49592.8
  other v3: 50640.12,49628.64
NetJ600_13: J600.13 R609.2 TP19.1 | length 410.3
  Top Layer w21.65: J600.13@50503.43,49511.46 50527.18,49535.21 v1@50545.3,49535.21
  Bottom Layer w11.02: TP19.1@50502.08,49517.92 50520.21,49536.04 50547.08,49536.04 50595,49583.96 50595,49748.96 50622.08,49776.04 R609.2@50657.08,49776.04
  other v1: 50546.06,49535.72
NetJ601_6: J601.6 R842.1 U602.46 | length 1098.9
  Top Layer w9.84: U602.46@49927.6,50288.33 49927.6,50388.96 49983.85,50445.21 50079.05,50445.21 50086.05,50438.21 v1@50088.01,50436.25
  Mid-Layer 2 w9.84: v1@50085,50440 50210,50440 50306.04,50343.96 50375.83,50343.96 50392.92,50361.04 50467.92,50361.04 v1@50517.92,50311.04
  Bottom Layer w11.02: v1@50517.92,50312.08 50557.08,50351.25 50557.08,50382.92 50567.08,50392.92 50647.92,50392.92 50699.17,50444.17 J601.6@50699.17,50500
  other v1: 50516.9,50310.72 50085.65,50437.8
NetJ601_7: J601.7 R841.2 U602.50 | length 1190.7
  Top Layer w9.84: U602.50@49805.62,50191.88 49855.93,50191.88 v1@49864.99,50200.94 ; v3@50433.85,50275 50464.68,50275 50488.85,50299.17 50488.85,50327.08 50495.1,50333.33 R841.2@50495.1,50368.75
  Mid-Layer 2 w9.84: v1@49866.04,50202.08 49866.04,50243.96 49912.08,50290 50128.96,50290 50158.96,50260 50420,50260 v3@50433.96,50273.96
  Bottom Layer w11.02: v3@50432.92,50273.96 50452.92,50273.96 50472.92,50293.96 50472.92,50382.92 50498.96,50408.96 50548.96,50408.96 50560,50420 50560,50470 J601.7@50597.92,50507.92
  other v1: 49866.48,50201.55
  other v3: 50435.65,50274.47
NetJ601_9: J601.9 R627.2 U602.55 | length 1001.3
  Top Layer w9.84: U602.55@49800.1,50093.54 49880.3,50093.54 49887.82,50101.05 v1@49888.85,50102.08
  Mid-Layer 2 w9.84: v1@49887.92,50100 49887.92,50106.04 49942.92,50161.04 49942.92,50237.92 49977.08,50272.08 50077.08,50272.08 50110.21,50238.96 50361.04,50238.96 v2@50367.92,50232.08
  Bottom Layer w11.02: v2@50366.04,50233.96 50366.04,50237.08 50412.92,50283.96 50412.92,50310 50385.83,50337.08 50385.83,50395.83 50402.08,50412.08 J601.9@50402.08,50489.17
  other v1: 49888.15,50100.72
  other v2: 50368.9,50235.64
NetJ601_10: J601.10 U602.49 | length 654.6
  Top Layer w9.84: U602.49@49804.47,50213.75 v1@49804.47,50246.46
  Mid-Layer 2 w9.84: v1@49802.08,50247.08 49830,50247.08 49892.92,50310 49974.17,50310 49994.17,50330 50074.17,50330 50127.08,50382.92 v1@50127.08,50417.08
  Bottom Layer w11.02: v1@50125.83,50415 50210.83,50500 J601.10@50297.08,50500
  other v1: 49803.98,50246.55 50126.48,50414.47
NetJ603_1: J603.1 T600.3 TP1.1 | length 289.2
  Top Layer w13.78: T600.3@47807.35,49644.58 47873.18,49578.75 47930.26,49578.75 47958.18,49550.83 J603.1@47958.18,49504.17
  Bottom Layer w15.75: v1@47890.83,49579.17 TP1.1@47890.83,49632.08
  other v1: 47891.44,49579.05
NetJ603_2: J603.2 T600.4 TP2.1 | length 248
  Top Layer w13.78: T600.4@47904.85,49661.25 47971.12,49594.98 47971.51,49594.58 47987.35,49594.58 48036.51,49545.42 J603.2@48036.51,49526.25
  Bottom Layer w15.75: v1@47970,49595 47980,49605 TP2.1@48015,49605
  other v1: 47970.19,49594.05
NetJ603_6: J603.6 T600.5 TP3.1 | length 483.9
  Top Layer w13.78: T600.5@48083.18,49678.33 48083.18,49636.67 48122.76,49597.08 48257.35,49597.08 48264.43,49590 48315.26,49590 48350.68,49554.58 J603.6@48350.68,49492.08
  Bottom Layer w15.75: TP3.1@48180,49602.92 48247.08,49602.92 v1@48255,49595
  other v1: 48255.19,49595.3
NetJ603_7: J603.7 T600.6 TP4.1 | length 433.1
  Top Layer w13.78: T600.6@48171.51,49660 48202.76,49628.75 48323.18,49628.75 48331.1,49620.83 48357.35,49620.83 48430.26,49547.92 J603.7@48430.26,49475.83
  Bottom Layer w15.75: TP4.1@48322.92,49567.08 48322.92,49610 v1@48332.08,49619.17
  other v1: 48332.27,49620.72
NetJ603_8: J603.8 R720.2 TP6.1 | length 578.4
  Top Layer w13.78: J603.8@48509.85,49481.25 48509.85,49588.75 48557.76,49636.67 48738.6,49636.67 48749.85,49625.42 R720.2@48882.76,49625.42
  Bottom Layer w15.75: TP6.1@48447.08,49595 48475,49567.08 v1@48508.96,49567.08
  other v1: 48508.94,49567.8
NetJ603_9: J603.9 R721.2 TP9.1 | length 381.2
  Top Layer w13.78: R721.2@48566.93,49757.71 48566.93,49731.67 48576.72,49721.88 v1@48580.89,49721.88
  Top Layer w17.72: J603.9@48586.51,49507.92 v1@48586.51,49562.08
  Mid-Layer 2 w15.75: v1@48577.92,49722.08 48537.08,49681.25 48537.08,49587.08 48564.17,49560 v1@48585,49560
  Bottom Layer w15.75: TP9.1@48527.08,49670.21 v1@48577.92,49721.04
  other v1: 48585.61,49561.14 48578.94,49721.55
NetJ603_10: J603.10 R670.2 TP7.1 U612.4 | length 861.8
  Top Layer w17.72: J603.10@48665.26,49501.25 v1@48665.26,49562.5 ; R670.2@48972.56,49821.46 48997.97,49821.46 49009.64,49809.79 49050.89,49809.79 49050.89,49791.04 v1@49029.01,49769.17
  Mid-Layer 2 w25.59: v1@48577.92,49607.92 48600.83,49607.92 48645.83,49562.92 v1@48665,49562.92
  Bottom Layer w15.75: v1@48665,49562.92 TP7.1@48665,49607.08
  Bottom Layer w19.68: v1@48575.83,49609.17 48576.29,49609.62 48731.67,49765 48734.58,49767.92 v1@49027.92,49767.92
  other v1: 48665.61,49561.14 48577.27,49608.64 49028.52,49767.39
NetJ603_11: J603.11 Q605.3 R670.1 TP8.1 | length 477.7
  Top Layer w13.78: Q605.3@48780.26,49681.88 48823.39,49725 48851.93,49725 48913.18,49786.25 R670.1@48913.18,49826.25
  Top Layer w17.72: J603.11@48743.6,49505.42 v1@48743.6,49560.83
  Bottom Layer w15.75: v1@48745,49560.83 48764.17,49580 48764.17,49647.92 48839.17,49722.92 v1@48844.17,49722.92
  other v1: 48744.77,49560.72 48844.77,49723.64